# Altium PCB Pcb.PcbDoc
Units mm, origin at the board's own origin, x right, y up, seen from the top; angles counter-clockwise.
Board outline 71.32 x 98.44 mm, 2 copper layers (Top Layer, Bottom Layer); 88 components, 52 nets, 334 pads, 52 vias.
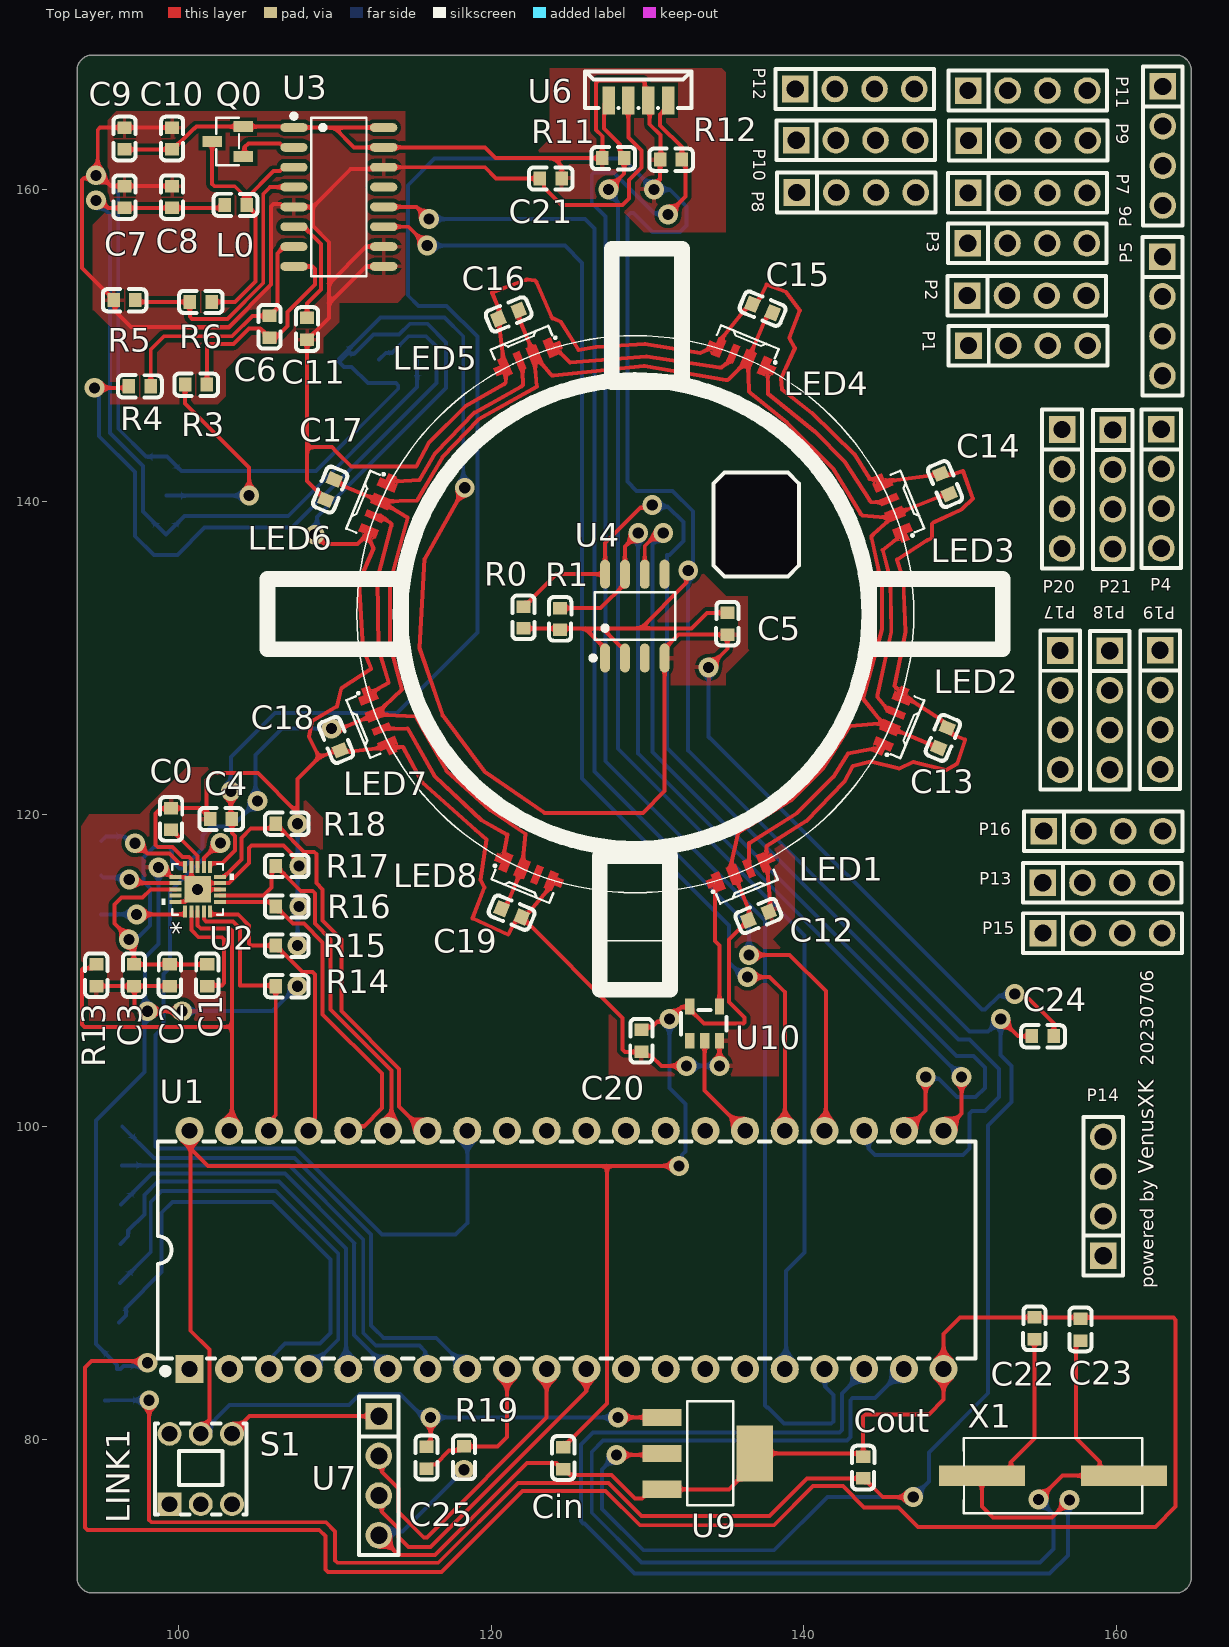
[diagram p0: Top Layer view]
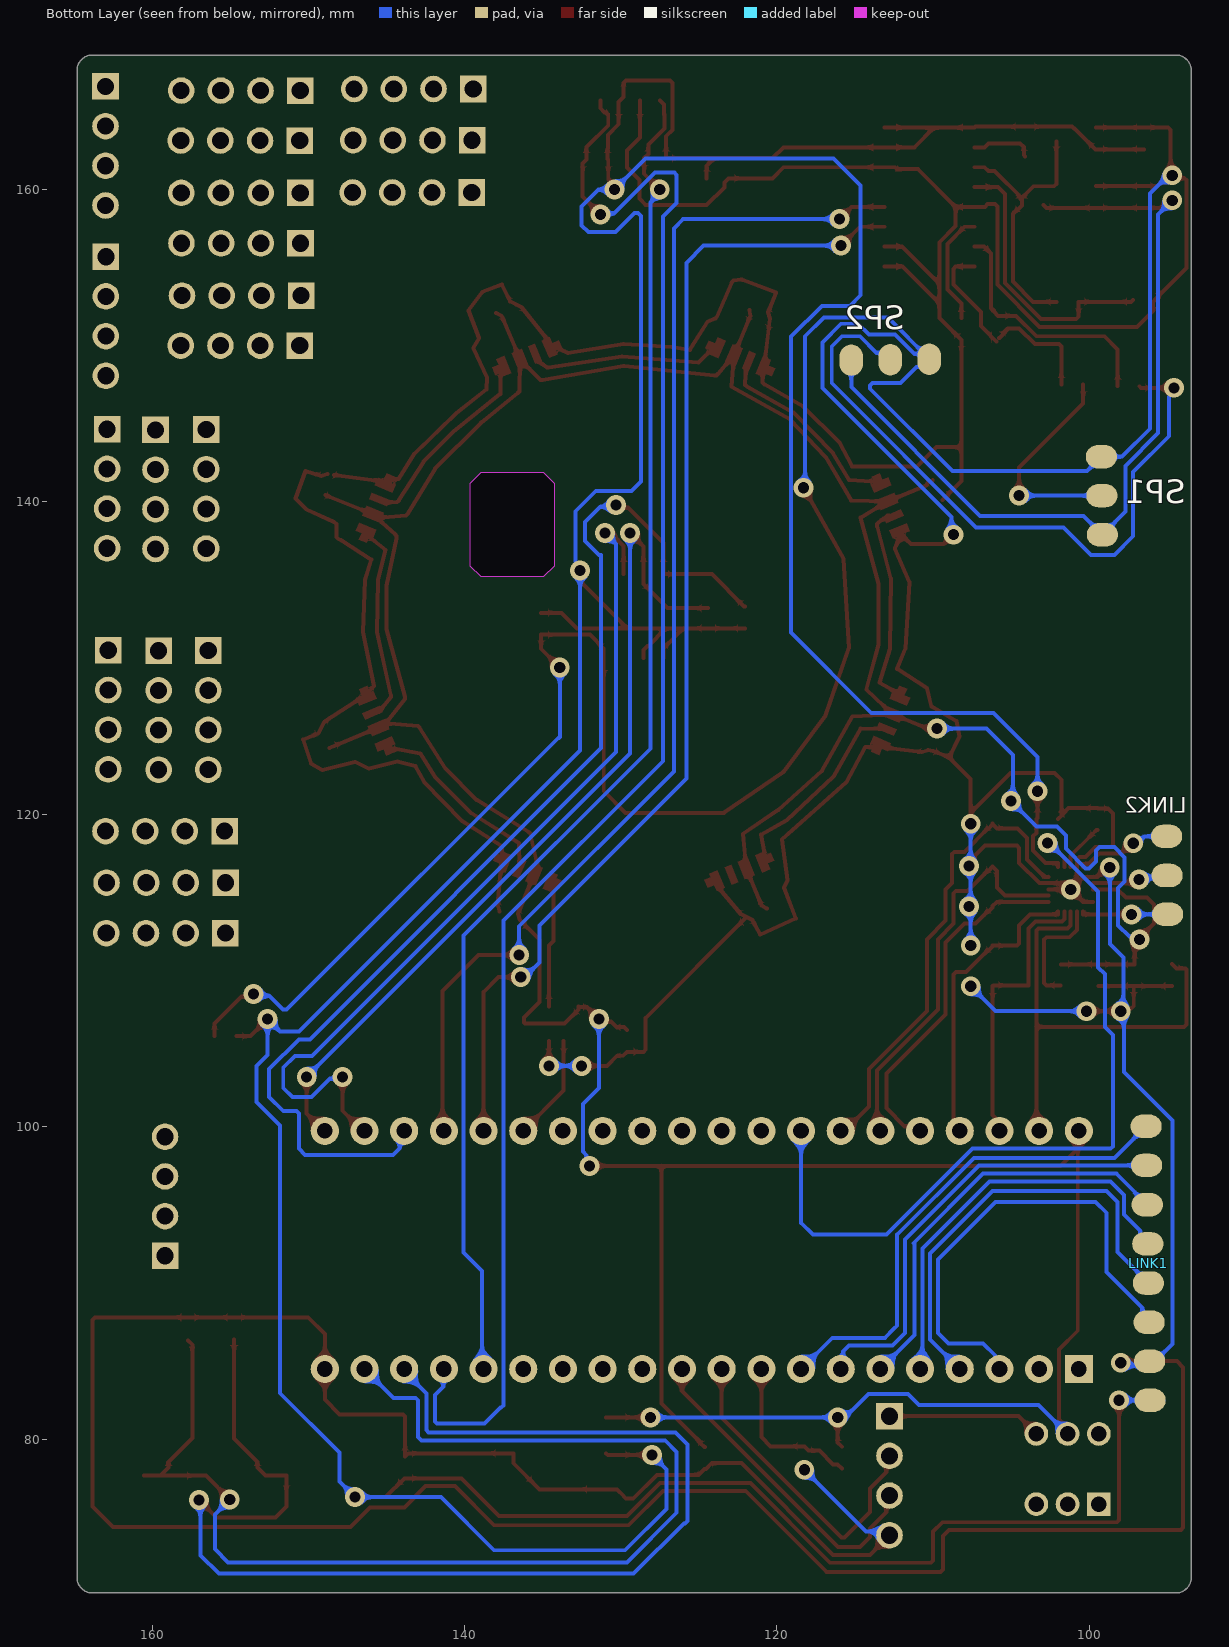
[diagram p1: Bottom Layer view, seen from below]

## Layer stack, top to bottom
Top Solder: solder mask 0.0102, Solder Resist, Dk 3.5
Top Layer: signal copper 0.0356
Dielectric 1: dielectric 0.32, FR-4, Dk 4.8
Bottom Layer: signal copper 0.0356
Bottom Solder: solder mask 0.0102, Solder Resist, Dk 3.5

## Board outline
93.48,71.165 93.48,167.6 cw(c94.48,167.6) 94.48,168.6 163.8,168.6 cw(c163.8,167.6) 164.8,167.6 164.8,71.165 cw(c163.8,71.165) 163.8,70.165 94.48,70.165 cw(c94.48,71.165)
cut-out: 134.225,135.925 134.225,141.175 134.925,141.875 138.975,141.875 139.675,141.175 139.675,135.925 138.975,135.225 134.925,135.225

## Design rules (kind name [scope] priority, off if disabled: settings)
Clearance [All] p1: gap=0.254 ignorepadtopadclearanceinfootprint=FALSE
PolygonConnect [All] p1: connectstyle=Relief reliefconductorwidth=0.254 reliefentries=4 polygonreliefangle="90 Angle" airgapwidth=0.254
RoutingVias [All] p1: holewidth=0.711 width=1.27 viastyle="Through Hole" minholewidth=0.711 minwidth=1.27 maxholewidth=0.711 maxwidth=1.27
SolderMaskExpansion [All] p1: expansion=0.102 istentingtop=FALSE
Width [All] p1: maxlimit=0.254 minlimit=0.15 preferedwidth=0.254
30 further rules are at their usual default settings.

## Components (designator, comment, footprint, x,y, rotation, side; value= is the part's Value field where it differs from the comment)
C0 "Capacitor 0.1 uF +/- 5% 16 V 0402" 0805贴片电容 99.5,119.7 r270 top value=100nF
C1 "Capacitor 0.1 uF +/- 5% 16 V 0402" 0805贴片电容 101.816,109.7 r270 top value=100nF
C2 "Capacitor 0.1 uF +/- 5% 16 V 0402" 0805贴片电容 99.416,109.7 r270 top value=100nF
C3 "Capacitor 0.1 uF +/- 5% 16 V 0402" 0805贴片电容 97.116,109.7 r270 top value=22uF
C4 "Capacitor 0.1 uF +/- 5% 16 V 0402" 0805贴片电容 102.7,119.7 r180 top value=100nF
C5 "Capacitor 0.1 uF +/- 5% 16 V 0402" 0805贴片电容 135.1,132.2 r270 top value=100nF
C6 "Capacitor 0.1 uF +/- 5% 16 V 0402" 0805贴片电容 105.8,151.2 r270 top value=100nF
C7 "Capacitor 0.1 uF +/- 5% 16 V 0402" 0805贴片电容 96.52,159.512 r90 top value=100nF
C8 "Capacitor 0.1 uF +/- 5% 16 V 0402" 0805贴片电容 99.568,159.512 r90 top value=10uF
C9 "Capacitor 0.1 uF +/- 5% 16 V 0402" 0805贴片电容 96.52,163.26 r90 top value=100nF
C10 "Capacitor 0.1 uF +/- 5% 16 V 0402" 0805贴片电容 99.568,163.26 r90 top value=10uF
C11 "Capacitor 0.1 uF +/- 5% 16 V 0402" 0805贴片电容 108.204,151.068 r90 top value=100nF
C12 "Capacitor 0.1 uF +/- 5% 16 V 0402" 0805贴片电容 137.1,113.5 r22.5 top value=100nF
C13 "Capacitor 0.1 uF +/- 5% 16 V 0402" 0805贴片电容 148.9,124.9 r67.5 top value=100nF
C14 "Capacitor 0.1 uF +/- 5% 16 V 0402" 0805贴片电容 149.032,141.147 r112.5 top value=100nF
C15 "Capacitor 0.1 uF +/- 5% 16 V 0402" 0805贴片电容 137.353,152.368 r157.5 top value=100nF
C16 "Capacitor 0.1 uF +/- 5% 16 V 0402" 0805贴片电容 121.1,152 r202.5 top value=100nF
C17 "Capacitor 0.1 uF +/- 5% 16 V 0402" 0805贴片电容 109.68,140.78 r247.5 top value=100nF
C18 "Capacitor 0.1 uF +/- 5% 16 V 0402" 0805贴片电容 110.068,124.753 r292.5 top value=100nF
C19 "Capacitor 0.1 uF +/- 5% 16 V 0402" 0805贴片电容 121.3,113.7 r337.5 top value=100nF
C20 "Capacitor 0.1 uF +/- 5% 16 V 0402" 0805贴片电容 129.6,105.5 r270 top value=100nF
C21 "Capacitor 0.1 uF +/- 5% 16 V 0402" 0805贴片电容 123.8,160.7 r180 top value=100nF
C22 "Capacitor 0.1 uF +/- 5% 16 V 0402" 0805贴片电容 154.75,87.1 r270 top value=20pF
C23 "Capacitor 0.1 uF +/- 5% 16 V 0402" 0805贴片电容 157.7,87.025 r270 top value=20pF
C24 "Capacitor 0.1 uF +/- 5% 16 V 0402" 0805贴片电容 155.3,105.8 r180 top value=10uF
C25 "Capacitor 0.1 uF +/- 5% 16 V 0402" 0805贴片电容 115.85,78.825 r270 top value=10uF
Cin "Capacitor 0.1 uF +/- 5% 16 V 0402" 0805贴片电容 124.6,78.8 r270 top value=4.7uF
Cout "Capacitor 0.1 uF +/- 5% 16 V 0402" 0805贴片电容 143.8,78.2 r90 top value=4.7uF
L0 "LQM2HPN1R0MJ0L" 0805贴片电容 103.632,159.004 r0 top value=3.3µH
LED1 "SK6812SIDE-A" FZ-SK6812SIDE-A 135.965,116.311 r22.5 top
LED2 "SK6812SIDE-A" FZ-SK6812SIDE-A 145.682,125.966 r67.5 top
LED3 "SK6812SIDE-A" FZ-SK6812SIDE-A 145.687,139.625 r112.5 top
LED4 "SK6812SIDE-A" FZ-SK6812SIDE-A 136.022,149.285 r157.5 top
LED5 "SK6812SIDE-A" FZ-SK6812SIDE-A 122.322,149.249 r202.5 top
LED6 "SK6812SIDE-A" FZ-SK6812SIDE-A 112.74,139.616 r247.5 top
LED7 "SK6812SIDE-A" FZ-SK6812SIDE-A 112.748,125.982 r292.5 top
LED8 "SK6812SIDE-A" FZ-SK6812SIDE-A 122.379,116.346 r337.5 top
LINK1 "LINK" LINK 96.119,82.5 r90 top
LINK2 "LINK2" LINK2 95.063,118.591 r270 top
P1 "4P" 2.54管脚 154.35,150 r0 top
P2 "4P" 2.54管脚 154.27,153.2 r0 top
P3 "4P" 2.54管脚 154.305,156.55 r0 top
P4 "4P" 2.54管脚 162.875,140.84 r270 top
P5 "4P" 2.54管脚 162.95,151.88 r270 top
P6 "4P" 2.54管脚 162.975,162.78 r270 top
P7 "4P" 2.54管脚 154.32,159.775 r0 top
P8 "4P" 2.54管脚 143.35,159.8 r0 top
P9 "4P" 2.54管脚 154.355,163.125 r0 top
P10 "4P" 2.54管脚 143.32,163.15 r0 top
P11 "4P" 2.54管脚 154.325,166.325 r0 top
P12 "4P" 2.54管脚 143.255,166.425 r0 top
P13 "4P" 2.54管脚 159.1,115.625 r0 top
P14 "4P" 2.54管脚 159.165,95.555 r90 top
P15 "4P" 2.54管脚 159.115,112.4 r0 top
P16 "4P" 2.54管脚 159.165,118.925 r0 top
P17 "4P" 2.54管脚 156.4,126.675 r270 top
P18 "4P" 2.54管脚 159.575,126.665 r270 top
P19 "4P" 2.54管脚 162.8,126.69 r270 top
P20 "4P" 2.54管脚 156.525,140.82 r270 top
P21 "4P" 2.54管脚 159.775,140.795 r270 top
Q0 "MMBT4403" FZ-MMBT4403 103.124,163.068 r0 top
R0 "4D7KR2F" 0805贴片电容 122.053,132.6 r270 top value=2.2k
R1 "4D7KR2F" 0805贴片电容 124.4,132.5 r270 top value=2.2k
R3 "4D7KR2F" 0805贴片电容 101.1,147.5 r180 top value=100
R4 "4D7KR2F" 0805贴片电容 97.5,147.4 r180 top value=100
R5 "4D7KR2F" 0805贴片电容 96.52,152.908 r180 top value=8.2k
R6 "4D7KR2F" 0805贴片电容 101.4,152.8 r180 top value=10k
R11 "4D7KR2F" 0805贴片电容 127.8,162 r180 top value=2.2k
R12 "4D7KR2F" 0805贴片电容 131.5,161.9 r180 top value=2.2k
R13 "4D7KR2F" 0805贴片电容 94.716,109.709 r90 top value=10K
R14 "4D7KR2F" 0805贴片电容 106.9,109 r180 top value=10K
R15 "4D7KR2F" 0805贴片电容 106.9,111.6 r180 top value=10K
R16 "4D7KR2F" 0805贴片电容 106.9,114.1 r180 top value=10K (schematic designator 16)
R17 "4D7KR2F" 0805贴片电容 106.9,116.7 r180 top value=10K
R18 "4D7KR2F" 0805贴片电容 106.9,119.4 r180 top value=10K
R19 "4D7KR2F" 0805贴片电容 118.25,78.85 r90 top value=10k
S1 "5.8^2-Switch" FZ-Switch 101.4,78.1 r180 top
SP1 "StrainPiece1" LINK2 99.169,137.9 r90 top
SP2 "StrainPiece2" LINK2 115.245,149.066 r180 top
U1 "STC89C51-PDIP-40" 封装.STC89C51-PDIP-40 124.81,92.12 r0 top
U2 "TMC6300-3" 封装.TMC6300 101.2,115.2 r90 top
U3 "HX711" 封装.HX711 110.236,159.512 r270 top
U4 "MT6701" 封装.MT6701 129.182,132.687 r0 top
U6 "VEML7700" 封装.VEML7700 129.405,165.7 r0 top
U7 "USB" 2.54管脚 112.8,77.67 r270 top
U9 "AP2114HA-3.3" 封装.AP2114HA-3.3TRG1 133.9,79.1 r180 top
U10 "SN74LV1T34DBV" 封装.SN74LV1T34DBVR 133.65,106.6 r270 top
X1 "9C12000002" HC-49S_L11.4-W4.8 155.947,77.675 r180 top value=-

## Footprints (in the part's own frame and the unit in brackets; to place one, negate y for a bottom-side part, rotate by r counter-clockwise, add the part's x,y. Pads: shape width x height; smd on the part's side, far side on the other; paste and mask are expansions set on the pad)
2.54管脚 [mm]
  rect 1.7x1.7 hole 1.1: 1(-3.81,0)
  round 1.7 hole 1.1: 2(-1.27,0) 3(1.27,0) 4(3.81,0)
  silkscreen extent -5.08,-1.27 5.08,1.27
0805贴片电容 [mm]
  rect 0.8x0.9 smd: 1(-0.7,0) 2(0.7,0)
  silkscreen extent -1.41,-0.71 1.39,0.72
FZ-MMBT4403 [mm]
  rect 1.25x0.7 smd: 1(1,0.95) 2(1,-0.95) 3(-1,0)
  silkscreen extent -0.73,-1.53 0.73,1.53
FZ-SK6812SIDE-A [mil]
  round 1 smd: 1(-70.87,-0.49) 2(-17.72,0.49) 3(22.64,0.49) 4(70.86,0.49)
  Top Layer region: -31.5,24.12 -31.5,-23.13 -3.94,-23.13 -3.94,24.12 -31.5,24.12
  Top Layer region: -51.18,23.13 -51.18,-24.11 -72.84,-24.11 -72.84,-8.36 -90.55,-8.36 -90.55,13.29 -72.84,13.29 -72.84,23.13 -51.18,23.13
  Top Layer region: 13.78,-23.13 31.49,-23.13 31.49,24.11 13.78,24.11 13.78,-23.13
  Top Layer region: 51.18,24.11 51.18,-23.13 72.83,-23.13 72.83,-7.38 90.55,-7.38 90.55,14.27 72.83,14.27 72.83,24.11 51.18,24.11
  silkscreen extent -87,-54 79,-16
FZ-Switch [mil]
  rect 60x60 hole 39.37: 1(78.74,88.59)
  round 60 hole 39.37: 2(0,88.59) 3(-78.74,88.59) 4(-78.74,-88.59) 5(0,-88.59) 6(78.74,-88.59)
  silkscreen extent -115,-115 115,115
HC-49S_L11.4-W4.8 [mm]
  rect 5.5x1.3 smd: 1(-4.553,0) 2(4.553,0)
  silkscreen extent -5.71,-2.41 5.72,2.41
LINK [mm]
  oval 1.5x2 smd far side: 1(0,0) 2(2.5,-0.031) 3(4.991,-0.063) 4(7.501,-0.104) 5(10.008,-0.145) 6(12.516,-0.182) 7(15.034,-0.228) 8(17.531,-0.256)
LINK2 [mm]
  oval 1.5x2 smd far side: 1(0,0) 2(2.5,-0.031) 3(4.991,-0.063)
封装.AP2114HA-3.3TRG1 [mm]
  rect 2.5x1.1 smd: 1(2.97,-2.3) 2(2.97,0) 3(2.97,2.3)
  rect 2.34x3.6 smd: 4(-2.97,0)
  silkscreen extent -1.57,-3.33 1.37,3.33
封装.HX711 [mm]
  oval 0.56x1.745 smd: 1(-4.445,-2.872) 2(-3.175,-2.872) 3(-1.905,-2.872) 4(-0.635,-2.872) 5(0.635,-2.872) 6(1.905,-2.872) 7(3.175,-2.872) 8(4.445,-2.872) 9(4.445,2.872) 10(3.175,2.872) 11(1.905,2.872) 12(0.635,2.872) 13(-0.635,2.872) 14(-1.905,2.872) 15(-3.175,2.872) 16(-4.445,2.872)
  silkscreen extent -5.33,-3.02 5.08,1.77
封装.MT6701 [mm]
  oval 0.63x1.865 smd: 1(-1.905,-2.682) 2(-0.635,-2.682) 3(0.635,-2.682) 4(1.905,-2.682) 5(1.905,2.683) 6(0.635,2.683) 7(-0.635,2.683) 8(-1.905,2.683)
  silkscreen extent -2.82,-2.83 2.58,1.52
封装.SN74LV1T34DBVR [mm]
  rect 1x0.6 smd paste+0 mask+0.05: 1(1.1,-0.95) 2(1.1,0) 3(1.1,0.95) 4(-1.1,0.95) 5(-1.1,-0.95)
  silkscreen extent -0.89,-1.52 0.7,1.4
封装.STC89C51-PDIP-40 [mm]
  rect 1.8x1.8 hole 1: 1(-24.13,-7.62)
  round 1.8 hole 1: 2(-21.59,-7.62) 3(-19.05,-7.62) 4(-16.51,-7.62) 5(-13.97,-7.62) 6(-11.43,-7.62) 7(-8.89,-7.62) 8(-6.35,-7.62) 9(-3.81,-7.62) 10(-1.27,-7.62) 11(1.27,-7.62) 12(3.81,-7.62) 13(6.35,-7.62) 14(8.89,-7.62) 15(11.43,-7.62) 16(13.97,-7.62) 17(16.51,-7.62) 18(19.05,-7.62) 19(21.59,-7.62) 20(24.13,-7.62) 21(24.13,7.62) 22(21.59,7.62) 23(19.05,7.62) 24(16.51,7.62) 25(13.97,7.62) 26(11.43,7.62) 27(8.89,7.62) 28(6.35,7.62) 29(3.81,7.62) 30(1.27,7.62) 31(-1.27,7.62) 32(-3.81,7.62) 33(-6.35,7.62) 34(-8.89,7.62) 35(-11.43,7.62) 36(-13.97,7.62) 37(-16.51,7.62) 38(-19.05,7.62) 39(-21.59,7.62) 40(-24.13,7.62)
  silkscreen extent -26.16,-7.95 26.16,6.93
封装.TMC6300 [mil]
  rect 30x10 smd paste+0 mask+0: 1(-56,31.5) 2(-56,15.75) 3(-56,0) 4(-56,-15.75) 5(-56,-31.5) 11(56,-31.5) 12(56,-15.75) 13(56,0) 14(56,15.75) 15(56,31.5)
  rect 10x30 smd paste+0 mask+0: 6(-31.5,-56) 7(-15.75,-56) 8(0,-56) 9(15.75,-56) 10(31.5,-56) 16(31.5,56) 17(15.75,56) 18(0,56) 19(-15.75,56) 20(-31.5,56)
  rect 67x67 smd paste+0 mask+0: 21(0,0)
  silkscreen extent -64,-91 64,91
封装.VEML7700 [mm]
  rect 0.8x1.8 smd paste+0 mask+0.05: 1(1.905,0) 2(0.635,0) 3(-0.635,0) 4(-1.905,0)
  silkscreen extent -3.4,-0.5 3.4,1.85

## Part data
C0 C1 C2 C3 C4 C5 C6 C7 C8 C9 C10 C11 C12 C13 C14 C15 C16 C17 C18 C19 C20 C21 C22 C23 C24 C25 Cin Cout: library part CAP-NP-2, "Chip Capacitor, 0.1 uF, +/- 5%, 16 V, 0402 (1005 Metric)", Capacitor Type=Ceramic, Case/Package=0402, Max Operating Temperature=125°C, Min Operating Temperature=-55°C, Tolerance=5%, Voltage Rating=16V, Mounting Technology=SM, Pins=2, RoHS Compliant=True
L0: library part CMP-006-00008-6, "Chip Inductor, 1 uH, +/- 20%, 1 MHz, -55 to 125 degC, 1008 (2520 Metric), RoHS, Tape and Reel", Case/Package=1008, Current Rating=1.5A, Manufacturer=Murata, Max Operating Temperature=85°C, Min Operating Temperature=-40°C, Package Description="2-Pin Surface Mount Device, Body 2.5 x 2 mm", Package Quantity=3000, Resistance=0.09Ohm, Self Resonant Frequency=70MHz, Tolerance=20%, Core Material=Ferrite, Datasheet URL=http://psearch.en.murata.com/inductor/product/LQM2HPN1R0MJ0%23.pdf, Datasheet Version=Aug-16, Mounting Technology=SM, Package Reference=1008, Packaging=TapeandReel, RoHS Compliant=True, Shielding=Shielded
LED1 LED2 LED3 LED4 LED5 LED6 LED7 LED8: library part CMP-007-000137-1, Design Item ID=SK6812SIDE-A, Source=IC.SchLib
LINK1: library part CMP-014-000001-1, Design Item ID=LINK, Source=Board.SchLib
LINK2: library part CMP-014-000018-1, Design Item ID=LINK2, Source=Board.SchLib
P1 P2 P3 P4 P5 P6 P7 P8 P9 P10 P11 P12 P13 P14 P15 P16 P17 P18 P19 P20 P21: library part CMP-014-000031-1, Design Item ID=4P, Source=Board.SchLib
Q0: library part CMP-013-00004-3, Case/Package=TO-92-3, Manufacturer=Unisonic, Package Description="3-Pin Through Hole Device, Dia 4.58 mm, Pitch 1.27 mm", Datasheet URL=http://media.nkcelectronics.com/datasheet/s8550.pdf, Datasheet Version="Rev. E, 06/2014", Mounting Technology=TH, Package Reference=TO-92-3, RoHS Compliant=Unknown
R0 R1 R3 R4 R5 R6 R12 R13 R14 R15 R16 R17 R18 R19: library part CMP-009-00105-2, "4K7 0.063W 1% 0402 (1005 Metric)  SMD", Case/Package=0402, Power=63mW, Tolerance=1%, Mounting Technology=SMT, Pins=2
R11: library part CMP-009-00105-2, Case/Package=0402, Power=63mW, Tolerance=1%, Mounting Technology=SMT, Pins=2
S1: library part CMP-011-00013-1, Design Item ID=5.8^2-Switch, Designer=U?, Device="5.8 ZSPT", Source=IC.SchLib, Symbol="5.8 ZSPT"
SP1: library part CMP-014-000027-1, Design Item ID=StrainPiece1, Source=Board.SchLib
SP2: library part CMP-014-000028-1, Design Item ID=StrainPiece2, Source=Board.SchLib
U1: library part CMP-007-000098-1, "主控MCU", Design Item ID=STC89C51-PDIP-40, Source=IC.SchLib
U2: library part CMP-007-000236-1, Design Item ID=TMC6300-3, Source=IC.SchLib
U3: library part CMP-007-000093-1, "压力模数转换器", Design Item ID=HX711, Source=IC.SchLib
U4: library part CMP-007-000116-1, "霍尔传感器", Design Item ID=MT6701, Source=IC.SchLib
U6: library part CMP-007-000095-1, "感光想读传感器", Design Item ID=VEML7700, Source=IC.SchLib
U7: library part CMP-007-000053-1, Design Item ID=USB, Source=IC.SchLib
U9: library part CMP-007-000082-1, "电压控制器", Design Item ID=AP2114HA-3.3, Source=IC.SchLib
U10: library part CMP-007-000097-1, "电流放大器", Design Item ID=SN74LV1T34DBV, Source=IC.SchLib
X1: library part CMP-007-000156-1, JLCPCB Part Class="Extended Part", LCSC Part Name="SMD HC-49S 12M 49SMD 20pF 20ppm 30R 0~70℃", Load Capacitance=-, Manufacturer=TXC(晶技), Add into BOM=yes, Convert to PCB=yes, Crystal Type=-, Datasheet=https://atta.szlcsc.com/upload/public/pdf/source/20161217/1481939208787.pdf, Design Item ID=9C12000002, Device=9C12000002, Manufacturer Part=9C12000002, Operating Temperature=-, Source=IC.SchLib, Supplier Footprint=HC-49S-SMD, Supplier Part=C90939, Symbol=9C1202LCSC-DDK2S

## Via types
v1: diameter 1.27, hole 0.711, Top Layer to Bottom Layer, 52 vias

## Nets (pads, with @x,y where several pads share a name; then routed paths per layer and width w, separated by ;. In a path a pad name is that pad's centre, name@x,y a point inside that pad or via, vN(x,y) a via of type N, cw(c..) or ccw(c..) an arc to the next point about the centre after c; other vN are vias at no path point)
+3.3V: C4.1 C5.1 C9.1 C10.1 C21.1 C24.2 Cout.1 LINK1.1 Q0.1 R0.2 R1.2 R11.2 R12.2 U2.11 U3.1 U3.15 U3.16 U4.1 U4.2 U6.2 U9.2 | length 356.7
  Top Layer w0.254: C9.1 C10.1 99.618,162.56 100.958,163.9 101,163.9 101.118,164.018 Q0.1 106.494,164.018 106.496,164.016 107.305,164.016 U3.1 109.943,163.957 ; v1(98.1,82.5) 98.1,74.842 98.249,74.693 109.407,74.693 110,74.1 110,72.249 110.149,72.1 116.6,72.1 121.7,77.2 127.5,77.2 129.6,75.1 137.8,75.1 140.2,77.5 Cout.1 143.85,77.5 145.05,76.3 v1(147,76.3) ; U2.11 102,116.876 102.803,116.876 103.6,117.674 103.6,118.6 103.4,118.8 C4.1 103.325,119.775 v1(103.325,121.475) ; U3.16 109.943,163.957 ; R0.2 125.999,131.9 ; C21.1 124.5,161.5 124,162 ; U4.1 127.277,130.622 125.999,131.9 ; v1(128,79) 130.83,79 U9.2 ; U4.2 128.547,130.521 128.281,130.786 128.234,130.786 127.121,131.9 ; v1(130.4,160) 130.4,160.275 130.8,160.675 R12.2 130.848,161.948 130.848,162.582 130.82,162.61 130.82,163.48 130.132,164.168 130.132,165.608 U6.2 129.82,165.92 129.82,166.811 129.672,166.96 126.849,166.96 126.7,166.811 126.7,163.8 127.1,163.4 R11.2 124,162 ; v1(132.6,135.6) 132.472,135.472 132.472,134.8 129.572,131.9 ; C5.1 133.8,132.9 132.8,131.9 129.572,131.9 ; v1(152.6,106.9) 153.7,105.8 C24.2 ; 109.943,163.957 111.213,162.687 U3.15 119.587,162.687 120.274,162 124,162 ; 125.999,131.9 127.121,131.9 ; 127.121,131.9 129.572,131.9
  Bottom Layer w0.254: LINK1.1@95.269,82.484 95.519,82.484 95.534,82.5 v1(98.1,82.5) ; v1(103.325,121.475) 103.325,123.675 106.15,126.5 113.965,126.5 119.1,131.635 119.1,150.583 117.133,152.55 115.325,152.55 114.65,153.225 114.65,160.25 116.375,161.975 128.425,161.975 v1(130.4,160) 130.416,159.984 131.416,159.984 132.5,158.9 132.5,157.7 132.075,157.275 130.325,157.275 129.105,158.495 128.895,158.495 128.7,158.3 128.7,141.3 129.3,140.7 131.6,140.7 132.9,139.4 132.9,136.175 132.6,135.875 v1(132.6,135.6) 132.6,124.1 150.6,106.1 151.8,106.1 v1(152.6,106.9) 152.6,104.6 153.3,103.9 153.3,101.6 151.8,100.1 151.8,82.95 148,79.15 148,77.3 v1(147,76.3) 141.5,76.3 138.1,72.9 129.725,72.9 127.075,75.55 127.075,78.075 v1(128,79)
+5V: C1.1 C2.1 C3.1 C12.1 C13.1 C14.1 C15.1 C16.1 C17.1 C18.1 C19.1 C20.1 C25.1 Cin.1 LED1.2 LED2.2 LED3.2 LED4.2 LED5.2 LED6.2 LED7.2 LED8.2 S1.5 U1.40 U2.18 U9.1 U10.5 | length 300.7
  Top Layer w0.254: U2.18 98.2,115.2 97.675,114.675 96.325,114.675 95.875,114.225 95.875,113.024 96.808,112.091 v1(96.808,111.992) 97.116,111.684 C3.1 C2.1 C1.1 ; U1.40 U1.40@100.732,99.688 ; U1.40@100.75,99.67 100.75,86.95 101.95,85.75 101.95,81.244 101.4,80.694 S1.5 ; 100.776,98.582 101.858,97.5 127.4,97.5 ; C18.1 110.152,125.393 LED7.2 ; C17.1@110.03,141.374 C17.1@110.03,141.386 ; C17.1@110.228,141.328 110.462,141.047 LED6.2 ; C25.1 116.114,79.789 v1(116.114,81.4) ; C16.1 121.71,151.903 LED5.2 ; Cin.1 124.65,79.5 124.923,79.773 124.923,79.823 127.4,82.3 127.4,97.5 ; v1(128.1,81.4) U9.1 ; C20.1 129.782,106.382 130.282,106.382 130.636,106.736 131.236,106.736 v1(131.4,106.9) 132.168,107.668 132.667,107.668 U10.5 132.7,107.5 133.6,106.6 136.13,106.6 136.2,106.67 136.2,107 135.2,108 135.2,111.979 C12.1 136.582,113.635 LED1.2 135.308,116.523 135.308,116.625 135.79,118.781 135.842,118.833 135.863,118.854 135.889,118.87 139.221,120.921 141.215,122.924 142.879,125.544 142.894,125.568 142.979,125.653 145.153,125.844 LED2.2 ; v1(132,97.5) 127.4,97.5 ; C15.1 137.624,151.906 LED4.2 ; 144.412,137.893 144.338,137.819 144.338,137.714 144.338,137.687 144.343,137.661 144.994,134.626 145,131.835 143.81,127.535 143.8,127.501 143.8,127.378 145.036,125.834 145.179,125.655 145.252,125.582 LED2.2 ; 144.412,137.894 144.416,137.897 145.564,138.946 LED3.2 C14.1@148.897,140.429 ; 145.553,138.959 143.741,139.124 143.676,139.189 143.655,139.21 143.639,139.236 141.878,142.122 138.938,145.059 138.929,145.068 136.581,146.97 136.571,146.979 136.562,146.988 136.49,147.06 LED4.2 ; C13.1 148.335,124.38 LED2.2 ; LED7.2 115.173,126.27 117.132,122.771 119.914,120.291 122.184,118.741 LED8.2 C19.1@120.993,114.177 ; LED7.2 114.283,127.99 113.509,130.868 113.5,134.766 114.644,138.994 LED6.2 ; LED6.2 115.253,140.096 116.885,142.874 119.174,145.272 122.906,147.378 LED5.2 ; C19.1@120.993,114.177 C19.1 C19.1@120.993,114.177 ; LED5.2 123.782,148.191 123.788,148.183 123.795,148.176 123.87,148.102 123.975,148.102 123.988,148.102 129.778,148.698 129.813,148.698 135.001,147.792 135.023,147.792 135.128,147.792 135.203,147.867 LED4.2
  Bottom Layer w0.254: v1(96.808,111.992) 97.003,112.186 97.451,112.186 98.165,112.9 98.165,115.282 97.75,115.697 97.75,117.252 98.398,117.9 99.357,117.9 99.574,117.682 99.574,116.995 100.03,116.54 100.24,116.54 101.5,117.8 101.5,118.651 102.066,119.217 103.392,119.217 v1(105.025,120.85) 104.9,120.975 104.9,123.8 106.592,125.492 v1(109.762,125.492) ; S1.5 103.25,82.2 110.9,82.2 111.6,82.9 114.151,82.9 115.651,81.4 v1(116.114,81.4) v1(128.1,81.4) ; v1(131.4,106.9) 131.4,102.5 132.425,101.475 132.425,98.425 132.214,98.214 132.214,98.177 132.194,98.157 132.194,97.694 v1(132,97.5)
LCD_BACKLIGHT: LINK1.6 U1.6 | length 26.6
  Bottom Layer w0.254: LINK1.6 98.285,97 106.8,97 111.25,92.55 111.2,92.5 111.2,86.68 U1.6
LCD_CMD: LINK1.8 U1.8 | length 31.9
  Bottom Layer w0.254: LINK1.8 98.406,98 107.4,98 112.303,93.097 112.303,87.297 112.5,87.1 113.1,86.5 116.46,86.5 U1.8
LCD_CS: LINK1.7 U1.7 | length 29.1
  Bottom Layer w0.254: LINK1.7 107.066,97.534 111.8,92.8 111.8,86.8 112.6,86 115.4,86 115.768,85.632 115.768,84.652 U1.7
LCD_DATA: LINK1.5 U1.5 | length 26.6
  Bottom Layer w0.254: LINK1.5 96.753,92.997 96.753,93.353 97.8,94.4 97.8,95.649 98.648,96.497 106.403,96.497 110.7,92.2 110.7,84.64 U1.5
LCD_RST: LINK1.3 U1.3 | length 30.7
  Bottom Layer w0.254: LINK1.3 96.607,87.916 96.607,88.407 98.9,90.7 98.9,94.5 99.6,95.2 106,95.2 109.7,91.5 109.7,86.8 109.025,86.125 106.8,86.125 106.056,85.381 106.056,84.796 U1.3
LCD_SCK: LINK1.4 U1.4 | length 28.1
  Bottom Layer w0.254: LINK1.4@96.227,90.004 98.2,91.977 98.2,95.2 98.9,95.9 106.2,95.9 110.2,91.9 110.2,86.4 U1.4
LED_DATA_3V3: U1.26 U10.2 | length 6.8
  Top Layer w0.254: U10.2 133.65,102.33 U1.26
LED_DATA_5V: LED1.1 U10.4 | length 8
  Top Layer w0.254: LED1.1 134.307,111.902 134.6,111.609 U10.4
MAG_CLK: R1.1 U1.21 U4.7 | length 55.7
  Top Layer w0.254: R1.1 126.994,133.2 128.547,134.752 U4.7 128.547,137.147 v1(129.4,138) ; U1.21@149.03,99.72 149.03,99.78 150.1,100.85 v1(150.1,103.2)
  Bottom Layer w0.254: v1(129.4,138) 129.4,123.9 v1(150.1,103.2)
MAG_CSN: U1.22 U4.6 | length 57.2
  Top Layer w0.254: U4.6 129.817,137.183 130.439,137.806 130.806,137.806 v1(131,138) ; U1.22@146.49,99.72 147.8,101.03 v1(147.8,103.2)
  Bottom Layer w0.254: v1(131,138) 130.3,137.3 130.3,124 149.759,104.541 150.859,104.541 151.6,103.8 151.6,102.5 151,101.9 149.8,101.9 148.614,103.086 147.914,103.086 v1(147.8,103.2)
MAG_DO: R0.1 U1.23 U4.8 | length 73.7
  Top Layer w0.254: R0.1 122.103,133.3 124.173,135.37 U4.8 127.277,137.377 129.536,139.636 130.136,139.636 v1(130.3,139.8)
  Bottom Layer w0.254: v1(130.3,139.8) 130.416,139.684 131.316,139.684 132.3,138.7 132.3,137.5 131.4,136.6 131.249,136.6 131.249,124.251 149.9,105.6 150.6,105.6 152.5,103.7 152.5,101.9 151.6,101 150.749,101 150.6,100.851 150.6,98.6 150.2,98.2 144.568,98.2 144.151,98.617 144.151,99.519 U1.23@143.95,99.72
NetC0_2: C0.2 U2.13 | length 3.1
  Top Layer w0.254: C0.2 99.55,119 99.823,118.727 101.2,117.35 U2.13
NetC1_2: C1.2 U2.2 | length 7.4
  Top Layer w0.254: U2.2 100.8,112.6 101.265,112.135 102.751,112.135 102.9,111.986 102.9,109.201 102.751,109.052 C1.2@101.868,109.052
NetC6_1: C6.1 R4.1 U3.7 | length 16.3
  Top Layer w0.254: R4.1 98.2,149.751 99.049,150.6 103.4,150.6 104.7,151.9 C6.1 105.85,151.9 106.123,152.173 106.123,152.223 106.3,152.4 106.3,155.9 106.737,156.337 U3.7
NetC6_2: C6.2 R3.1 U3.8 | length 14.4
  Top Layer w0.254: R3.1 101.8,149.951 101.949,150.1 103.5,150.1 104.5,151.1 105.2,151.1 105.477,150.823 105.477,150.773 105.75,150.5 C6.2 ; C6.2@105.951,150.249 106.948,151.245 106.948,152.148 108.712,153.912 108.712,154.918 108.563,155.067 U3.8
NetC11_2: C11.2 U3.6 | length 7.3
  Top Layer w0.254: U3.6 107.993,157.607 109.1,156.5 109.1,153.604 108.204,152.708 C11.2
NetC22_2: C22.2 U1.18 X1.2 | length 82.4
  Top Layer w0.254: C22.2 154.75,80.052 153.255,78.557 153.255,78.198 152.732,77.675 X1.2 151.394,75.706 152.1,75 155.875,75 v1(157,76.125)
  Bottom Layer w0.254: U1.18 143.86,84.355 142.44,82.935 142.44,80.599 142.291,80.45 126.5,80.45 125.725,79.675 125.725,74.774 125.874,74.625 125.95,74.625 129.175,71.4 155.725,71.4 156.9,72.575 156.9,76.025 v1(157,76.125)
NetC23_2: C23.2 U1.19 X1.1 | length 78.3
  Top Layer w0.254: v1(155.025,76.15) 156.55,77.675 X1.1@159.828,77.675 ; C23.2 157.688,86.325 157.415,86.052 157.415,80.088 158.945,78.557 158.945,78.198 159.468,77.675 X1.1@159.828,77.675 ; X1.1 160.057,77.675 X1.1@159.828,77.675
  Bottom Layer w0.254: U1.19 144.55,82.65 143.124,82.65 142.975,82.501 142.975,80.15 142.75,79.925 127.15,79.925 126.425,79.2 126.425,75.3 129.6,72.125 155.125,72.125 155.975,72.975 155.975,75.2 v1(155.025,76.15)
NetC25_2: C25.2 R19.2 U1.9 | length 10.3
  Top Layer w0.254: C25.2 116.123,78.398 116.413,78.398 117.292,79.277 117.977,79.277 R19.2 120.403,79.55 121,80.147 U1.9
NetL0_2: L0.2 Q0.3 R6.1 U3.3 | length 18.1
  Top Layer w0.254: R6.1 103.6,152.8 104.9,154.1 104.9,158.436 104.655,158.681 104.605,158.681 L0.2@104.332,158.954 ; Q0.3 102.124,160.349 102.273,160.2 103.576,160.2 L0.2@104.408,159.368 ; L0.2 104.332,159.432 106.064,161.164 106.469,161.164 106.722,161.417 U3.3
NetLED1_3: LED1.3 LED2.1 | length 12.5
  Top Layer w0.254: LED1.3 136.499,118.155 139.576,120.085 141.879,122.379 142.837,123.9 LED2.1
NetLED2_3: LED2.3 LED3.1 | length 12.9
  Top Layer w0.254: LED2.3 145.482,126.548 145.409,126.621 144.714,127.496 144.714,127.584 144.714,127.612 144.72,127.638 145.594,131.671 145.546,135.029 145.048,136.919 LED3.1
NetLED3_3: LED3.3 LED4.1 | length 12.6
  Top Layer w0.254: LED4.1 137.701,146.918 140.71,144.49 142.615,142.577 144.206,140.093 144.221,140.07 144.311,139.98 145.138,139.952 145.243,139.952 LED3.3
NetLED4_3: LED4.3 LED5.1 | length 12.5
  Top Layer w0.254: LED5.1 125.027,148.91 129.928,149.296 134.607,148.611 134.625,148.609 134.724,148.609 135.345,149.041 135.418,149.113 LED4.3
NetLED5_3: LED5.3 LED6.1 | length 12.8
  Top Layer w0.254: LED6.1 115.388,141.409 115.404,141.436 116.42,143.121 118.933,145.718 121.903,147.374 121.934,147.391 121.959,147.416 122.033,147.491 122.033,147.603 121.961,148.862 121.887,148.936 LED5.3
NetLED6_3: LED6.3 LED7.1 | length 13.2
  Top Layer w0.254: LED7.1 113.431,128.426 112.771,130.596 112.717,135.094 113.586,138.42 113.594,138.451 113.594,138.589 113.507,138.676 112.917,139.12 112.815,139.12 LED6.3
NetLED7_3: LED7.3 LED8.1 | length 12.9
  Top Layer w0.254: LED7.3 114.641,125.496 116.381,122.434 119.377,119.622 121.021,118.7 LED8.1
NetQ0_2: Q0.2 U3.2 | length 4
  Top Layer w0.254: Q0.2 104.2,162.194 104.2,162.7 104.45,162.95 106.469,162.95 106.732,162.687 U3.2
NetR5_1: R5.1 R6.2 U3.4 | length 18
  Top Layer w0.254: R5.1 97.328,152.8 R6.2 100.7,151.849 100.849,151.7 103.1,151.7 105.4,154 105.4,159.7 105.847,160.147 U3.4
NetS1_4: S1.4 U7.1 | length 9.9
  Top Layer w0.254: S1.4 104.53,81.48 U7.1
SCL: R12.1 U1.17 U6.1 | length 107
  Top Layer w0.254: v1(131.3,158.4) 132.436,159.536 132.436,161.664 R12.1 132.2,162.7 130.8,164.1 130.8,164.778 130.949,164.927 131.037,164.927 131.31,165.2 U6.1 ; U1.17@141.4,84.072 U1.17@141.4,84.47
  Bottom Layer w0.254: v1(131.3,158.4) 131.244,158.456 130.433,158.456 127.813,161.075 126.574,161.075 126.425,160.926 126.425,159.14 127.3,158.265 127.3,123.4 137.5,113.2 137.5,82.174 137.649,82.025 137.7,82.025 138.725,81 141.751,81 141.9,81.149 141.9,82.825 141.357,83.368 141.357,84.463 U1.17
SDA: R11.1 U1.16 U6.4 | length 88
  Top Layer w0.254: v1(127.5,160) 128.5,161 R11.1 128.227,162.273 128.227,162.873 127.2,163.9 127.2,164.778 127.227,164.805 127.227,165.427 U6.4 ; U1.16@138.87,84.48 U1.16@138.876,84.474
  Bottom Layer w0.254: v1(127.5,160) 127.5,159.763 128.1,159.163 128.1,124.2 140.05,112.25 140.05,91.95 138.87,90.77 U1.16@138.87,84.48
STRAIN_DO: U1.24 U3.12 | length 79.5
  Top Layer w0.254: U3.12 115.223,158.877 v1(116,158.1) ; v1(136.5,111) 139.09,111 141.41,108.68 U1.24@141.41,99.72
  Bottom Layer w0.254: v1(116,158.1) 126,158.1 126.6,157.5 126.6,122.738 136.5,112.838 v1(136.5,111)
STRAIN_E+: C7.1 C8.1 L0.1 SP1.1 SP2.1 | length 53.6
  Top Layer w0.254: v1(94.7,159.3) 94.975,159.3 95.463,158.812 C7.1 C8.1 102.74,158.812 L0.1
  Bottom Layer w0.254: v1@94.7,159.2 v1(94.7,159.3) 95.6,158.4 95.6,144.4 97.7,142.3 97.7,139.369 SP1.1 100.369,139.1 107,139.1 115.245,147.345 SP2.1
STRAIN_E-: C0.1 C2.2 C3.2 C4.2 C5.2 C7.2 C8.2 C9.2 C10.2 C11.1 C12.2 C13.2 C14.2 C15.2 C16.2 C17.2 C18.2 C19.2 C20.2 C21.2 C22.1 C23.1 C24.1 Cin.2 Cout.2 LED1.4 LED2.4 LED3.4 LED4.4 LED5.4 LED6.4 LED7.4 LED8.4 LINK1.2 R5.2 R13.1 R14.1 R15.1 R16.1 R17.1 R18.1 R19.1 SP1.3 SP2.3 U1.20 U2.8 U2.9 U2.14 U2.16 U2.20 U2.21 U3.5 U3.9 U3.10 U3.14 U4.4 U6.3 U7.4 U9.3 U9.4 U10.3 | length 723.4
  Top Layer w0.254: R13.1 99.407,109.009 C2.2 ; C3.2@97.166,109 97.166,107.734 97.336,107.564 ; v1(98,84.9) 97.9,85 94.4,85 94,84.6 94,74.349 94.149,74.2 108.983,74.2 109.383,73.8 109.383,71.664 109.532,71.516 116.816,71.516 122,76.7 127.3,76.7 129.5,74.5 138.1,74.5 140.6,77 142.5,77 143.85,75.65 146.05,75.65 147.3,74.4 162.5,74.4 163.8,75.7 163.8,87.651 163.651,87.8 159.375,87.8 C22.1 150,87.8 148.94,86.74 U1.20 148.94,82.54 148,81.6 143.949,81.6 143.8,81.451 Cout.2 143.6,79.1 U9.4 136.87,78.47 135.2,76.8 U9.3 130.23,76.8 129.807,76.377 129.807,76.349 129.658,76.2 129.2,76.2 127.68,77.72 125.03,77.72 124.65,78.1 124.55,78.1 124.175,78.475 122.275,78.475 116.4,72.6 114.06,72.6 U7.4 ; v1(98,107.4) v1(100.2,107.4) ; v1(98.7,116.6) 98.924,116.6 99.524,116 U2.16 100.4,116 U2.21@100.8,115.6 ; C8.2 C7.2 95.649,160.212 94.961,160.9 v1(94.7,160.9) ; C10.2 C9.2 94.957,163.96 94.808,163.811 94.808,161.008 v1(94.7,160.9) ; U2.20 100.4,114.4 v1(101.2,115.2) ; C4.2@101.8,119.95 101.35,120.4 C0.1 99.469,120.369 98.818,120.369 98.5,120.051 98.5,118.049 98.649,117.9 99.6,117.9 100.243,117.257 100.651,117.257 100.8,117.109 U2.14 U2.21@100.8,115.6 ; C4.2 101.775,119.925 101.775,122.2 102.225,122.65 105.05,122.65 107.6,120.1 ; U2.8 v1(101.2,115.2) ; R14.1@107.36,109.24 v1(107.6,109) R14.1@107.4,108.8 ; v1(107.6,111.6) 107.6,111.65 R15.1@107.873,111.923 ; R17.1 107.354,116.946 107.354,117.335 106.689,118 104.649,118 104.5,117.851 104.5,116.9 103.2,115.6 101.6,115.6 v1(101.2,115.2) ; v1(107.6,119.4) 107.6,120.1 ; v1(108.7,137.9) 108.737,137.9 109.332,137.305 111.419,137.305 LED6.4 112.456,137.005 111.527,134.871 111.788,130.602 112.313,129.314 110.393,128.061 110.126,126.913 108.511,125.965 108.318,124.989 108.981,123.642 ; C17.2 108.204,141.341 108.204,143.5 ; U3.9 111.967,155.067 109.6,152.7 ; U3.10 111.987,156.337 109.6,153.95 ; v1(118.3,140.9) 115.729,136.352 115.403,130.65 116.887,126.338 119.575,122.734 123.4,120.1 129.7,120.1 131.087,121.487 U4.4 131.087,130.609 131.978,131.5 C5.2 135.1,130.6 v1(133.9,129.4) ; LED8.4 122.323,113.626 C19.2 ; U6.3 128.77,163.33 129.6,162.5 129.6,161.4 128.81,160.61 128.81,159.41 128.4,159 124.5,159 123.373,160.127 123.373,160.427 C21.2 120.3,160.7 119.583,161.417 U3.14 112.433,161.417 112.306,161.289 110.984,161.289 108.572,158.877 ; v1(132.5,103.9) 130.88,103.9 130.23,104.55 129.85,104.55 C20.2 128.549,104.8 128.4,104.949 128.4,106.979 C19.2 ; v1(134.6,103.9) U10.3 ; C12.2 137.875,114.171 LED1.4 137.603,117.95 140.174,119.584 142.576,122.075 143.141,123.094 144.292,123.386 146.102,122.925 147.013,123.359 149.086,122.829 149.812,123.249 150.326,124.781 149.365,125.179 C13.2 148.974,125.923 LED2.4 145.799,128.2 146.494,131.67 146.362,135.026 145.962,136.303 147.885,137.54 147.9,137.55 148.093,137.638 148.2,137.745 148.2,138.588 148.307,138.695 148.348,138.714 150.135,139.535 150.814,140.214 150.182,141.973 149.167,141.665 C14.2 ; C14.2@148.361,141.722 LED3.4 144.207,141.474 143.217,143.073 140.509,145.691 138.6,147.2 138.546,147.935 139.433,149.854 139.065,150.488 139.744,152.254 138.846,153.44 137.614,153.917 137.082,152.83 C15.2 136.331,152.442 LED4.4 133.37,149.531 129.828,150.096 126.711,149.901 125.579,149.727 124.445,151.529 123.97,151.73 123.925,151.75 123.856,151.819 122.9,154.023 122.881,154.067 122.785,154.163 122.311,154.225 122.248,154.225 122.205,154.208 120.046,153.393 120.569,152.13 C16.2 120.494,151.399 120.806,148.834 120.806,148.731 LED5.4 120.83,148.392 120.904,148.318 120.921,147.746 120.921,147.742 120.921,147.633 120.846,147.559 120.822,147.534 120.792,147.517 118.33,146.117 116.027,143.827 115.191,142.27 111.032,142.27 110.102,143.2 110.1,143.2 109.8,143.5 108.204,143.5 ; v1(153.5,108.5) 153.664,108.336 154.264,108.336 156,106.6 C24.1 ; v1(94.7,160.9) 94.506,160.706 93.906,160.706 93.8,160.6 93.8,154.978 95.82,152.958 R5.2 95.924,152.804 95.924,152.226 96.95,151.2 103.2,151.2 105.9,153.9 105.9,158.901 106.049,159.05 106.515,159.05 106.688,158.877 108.572,158.877 ; U2.21@100.8,115.6 v1(101.2,115.2) ; 107.6,120.1 107.6,122.262 108.981,123.642 ; 108.204,143.5 C11.1 109.6,151.764 109.6,152.7 ; 108.572,158.877 108.572,157.645 109.6,156.617 109.6,153.95 ; 108.981,123.642 110.003,124.066 C18.2 110.739,123.978 LED7.4 114.344,124.303 115.579,122.039 118.999,119.001 119.69,118.396 119.313,115.79 119.549,115.304 118.794,113.345 121.081,112.3 121.571,113.238 C19.2 ; 109.6,152.7 109.6,153.95
  Bottom Layer w0.254: v1(94.7,160.9) 94.961,160.9 96.12,159.741 96.12,144.68 97.909,142.891 SP1.3 100.16,141.963 108.762,141.963 114.041,147.241 114.041,147.451 113.892,147.6 112.1,147.6 111.06,148.64 110.56,148.64 SP2.3@110.254,148.946 ; v1@97.8,106.825 97.8,103.5 94.7,100.4 94.7,86.1 96.04,84.76 96.04,84.509 96.274,84.509 96.47,84.706 97.806,84.706 v1(98,84.9) ; v1(98,107.4) 97.832,107.568 97.832,110.832 98.7,111.7 v1(98.7,116.6) ; v1(100.2,107.4) 106,107.4 v1(107.6,109) ; v1(107.6,111.6) v1(107.6,119.4) ; v1(108.7,137.9) 108.843,138.043 108.843,139.043 117.1,147.3 117.1,150.2 115.9,151.4 114.8,151.4 114.1,150.7 112.454,150.7 111.236,149.482 110.79,149.482 SP2.3@110.345,149.037 ; SP2.3 110.254,149.154 112.9,151.8 117,151.8 118.2,150.6 v1@118.2,141.2 ; U7.4 113.046,74.106 114.306,74.106 v1(118.25,78.05) ; v1(132.5,103.9) v1@134.4,103.9 ; v1(133.9,129.4) 133.9,124.949 133.949,124.9 134,124.9 151.395,107.505 151.605,107.505 152.484,108.384 153.384,108.384 v1(153.5,108.5)
  other v1: 107.7,114.1 107.7,116.7
STRAIN_S+: R3.2 SP1.2 | length 14.1
  Top Layer w0.254: R3.2 100.4,146.3 104.5,142.2 v1(104.5,140.4)
  Bottom Layer w0.254: SP1.2 v1(104.5,140.4)
STRAIN_S-: R4.2 SP2.2 | length 44.1
  Top Layer w0.254: v1(94.6,147.3) 96.7,147.3 R4.2
  Bottom Layer w0.254: v1(94.6,147.3) 94.6,147.025 94.9,146.725 94.9,144.2 97.2,141.9 97.2,137.8 98.4,136.6 99.9,136.6 101.65,138.35 107.25,138.35 116.495,147.595 116.495,149.935 115.83,150.6 114.7,150.6 113.641,149.541 113.241,149.541 SP2.2@112.8,149.1
STRAIN_SCK: U1.25 U3.11 | length 75.6
  Top Layer w0.254: U3.11 114.693,157.607 v1(115.9,156.4) ; v1(136.4,109.6) 136.416,109.584 137.816,109.584 138.785,108.615 138.785,99.805 U1.25@138.87,99.72
  Bottom Layer w0.254: v1(115.9,156.4) 124.7,156.4 125.8,155.3 125.8,122.3 135.2,112.9 135.2,110.525 136.125,109.6 v1(136.4,109.6)
TMC_DIAG: U1.33 U2.12 | length 52.1
  Top Layer w0.254: U2.12 101.6,117.202 102.573,118.175 v1(102.675,118.175) ; U1.33 U1.33@118.696,99.976
  Bottom Layer w0.254: v1(102.675,118.175) 102.564,118.175 99.44,115.051 99.44,110.201 99.016,109.777 99.016,106.382 98.5,105.865 98.5,98.757 98.649,98.608 107.492,98.608 113,93.1 117.7,93.1 118.46,93.86 U1.33
TMC_UH: R13.2 U1.39 U2.3 | length 30.4
  Top Layer w0.254: R13.2 94.443,110.136 93.849,110.136 93.8,110.087 93.8,106.549 93.949,106.4 103.4,106.4 ; U2.3 101.2,112.9 101.4,112.7 103.251,112.7 103.4,112.551 103.4,106.4 ; U1.39 103.4,99.92 103.4,106.4
TMC_UL: R16.2 U1.36 U2.6 | length 22.6
  Top Layer w0.254: U2.6 105.927,114.4 106.2,114.127 R16.2 106.2,114.05 106.473,113.777 106.523,113.777 107.3,113 108,113 109.2,111.8 109.2,107.2 113,103.4 113,101.2 111.836,100.036 111.136,100.036 U1.36
TMC_VH: R14.2 U1.38 U2.4 | length 18.4
  Top Layer w0.254: U2.4 101.6,113.291 101.749,113.143 103.457,113.143 103.9,112.7 103.9,109.049 106.151,109.049 R14.2 106.2,100.75 106.056,100.606 106.056,100.036 U1.38
TMC_VL: R18.2 U1.34 U2.10 | length 30
  Top Layer w0.254: U2.10 102.876,116 104,117.124 104,118.5 104.6,119.1 105.927,119.1 R18.2@106.2,119.373 ; R18.2 R18.2@106.2,119.373 ; U1.34 115.66,99.74 114.1,101.3 114.1,103.7 110.4,107.4 110.4,112 109.2,113.2 109.2,115.2 108.8,115.6 108.8,117.451 108.651,117.6 108,117.6 106.523,119.077 106.473,119.077 106.2,119.35 R18.2@106.2,119.373
TMC_WH: R15.2 U1.37 U2.5 | length 19.4
  Top Layer w0.254: U2.5 102,113.6 103.8,113.6 104.5,112.9 104.5,111.749 104.649,111.6 R15.2 106.2,111.55 106.473,111.277 106.523,111.277 107.9,109.9 108.551,109.9 108.7,109.751 108.7,100.558 108.3,100.158 U1.37
TMC_WL: R17.2 U1.35 U2.7 | length 25.5
  Top Layer w0.254: U2.7 105.4,114.8 105.927,115.327 105.927,116.377 106.2,116.65 106.473,116.377 106.523,116.377 107.8,115.1 108.551,115.1 108.7,114.951 108.7,113 109.7,112 109.7,107.5 113.609,103.591 113.609,99.969 U1.35
U: LINK2.1 U2.15 | length 6.4
  Top Layer w0.254: v1(97.2,118.15) 97.337,118.15 97.987,117.5 99.395,117.5 100.067,116.828 100.4,116.828 U2.15
  Bottom Layer w0.254: LINK2.1@95.031,118.3 95.322,118.591 96.484,118.591 96.925,118.15 v1(97.2,118.15)
USB-RX: U1.11 U7.3 | length 21
  Top Layer w0.254: U7.3 112.995,76.205 112.995,75.362 114.05,74.306 114.05,73.75 114.7,73.1 116.1,73.1 126.08,83.08 U1.11
USB-TX: U1.10 U7.2 | length 20.6
  Top Layer w0.254: U7.2 113,78.74 113,77.907 114.05,76.857 114.05,75.35 115.673,73.727 115.883,73.727 123.54,81.384 U1.10
V: LINK2.2 U2.17 | length 4.9
  Top Layer w0.254: v1(96.825,115.825) 97.1,115.825 97.325,115.6 U2.17
  Bottom Layer w0.254: LINK2.2 95.165,115.958 96.692,115.958 v1(96.825,115.825)
W: LINK2.3 U2.1 | length 5.6
  Top Layer w0.254: v1(97.3,113.6) 100.4,113.6 U2.1
  Bottom Layer w0.254: LINK2.3 v1(97.3,113.6)
pads on no net: LED8.3 P1.1 P1.2 P1.3 P1.4 P2.1 P2.2 P2.3 P2.4 P3.1 P3.2 P3.3 P3.4 P4.1 P4.2 P4.3 P4.4 P5.1 P5.2 P5.3 P5.4 P6.1 P6.2 P6.3 P6.4 P7.1 P7.2 P7.3 P7.4 P8.1 P8.2 P8.3 P8.4 P9.1 P9.2 P9.3 P9.4 P10.1 P10.2 P10.3 P10.4 P11.1 P11.2 P11.3 P11.4 P12.1 P12.2 P12.3 P12.4 P13.1 P13.2 P13.3 P13.4 P14.1 P14.2 P14.3 P14.4 P15.1 P15.2 P15.3 P15.4 P16.1 P16.2 P16.3 P16.4 P17.1 P17.2 P17.3 P17.4 P18.1 P18.2 P18.3 P18.4 P19.1 P19.2 P19.3 P19.4 P20.1 P20.2 P20.3 P20.4 P21.1 P21.2 P21.3 P21.4 S1.1 S1.2 S1.3 S1.6 U1.1 U1.2 U1.12 U1.13 U1.14 U1.15 U1.27 U1.28 U1.29 U1.30 U1.31 U1.32 U2.19 U3.13 U4.3 U4.5 U10.1

## Polygon pours and split planes (outlines as drawn)
+3.3V on Top Layer "+3.3V_L01_P009" (solid, remove dead copper, pour order 9): 123.75,167.75 134.75,167.75 135,167.5 135,157.25 129.75,157.25 128,159 122.5,159 121.609,159.891 121.609,161.975 122.475,161.975 123.75,163.25
STRAIN_E- on Top Layer "STRAIN_E-_L01_P008" (solid, remove dead copper, pour order 8): 127.5,103.25 140.25,103.25 140.75,103.75 140.75,109.25 138,112 139.403,113.403 139.403,117.297 137.757,118.943 135.813,117 133.5,117 133.5,112.25 134.8,110.95 134.8,108 128,108 127.5,107.5
STRAIN_E- on Top Layer "STRAIN_E-_L01_P006" (solid, remove dead copper, pour order 6): 94.25,120 97.5,120 100.5,123 106,123 109.25,119.75 109.2,119.7 109.2,107.72 104.152,107.72 102.682,106.25 94.25,106.25 94.25,107.455 93.75,107.955 93.75,119.25
STRAIN_E- on Top Layer "STRAIN_E-_L01_P005" (solid, remove dead copper, pour order 5): 120.5,133.5 120.5,131 121.5,130 125.5,130 125.5,129.97 127.3,128.17 127.38,128.25 135,128.25 135,129 136.5,130.5 136.41,130.59 136.41,133.975 135.025,133.975 133.5,135.5 133.5,136.9 131.5,138.9 131.5,140.5 130.75,141.25 129.5,141.25 129.5,140.75 126.5,137.75 126.5,135.5 125.5,134.5 121.25,134.5
STRAIN_E- on Top Layer "STRAIN_E-_L01_P000" (solid, remove dead copper, pour order 0): 96,165 114.5,165 114.5,153.25 114,152.75 110.25,152.75 110.25,151.5 109.25,150.5 109.25,149.5 104,149.5 103,148.5 103,146.75 102.5,146.25 102.494,146.256 95.6,146.256 95.6,151.194 94.544,152.25 94.5,152.25 94.5,157.75 95.312,158.562 95.438,158.562 95.438,164.438

## Silkscreen, mask and mechanical layers (free items; w line width, h text height)
Top Overlay:
  circle w0.1: c129.215,132.81 r17.826
  circle w1: c129.182,132.81 r15
  lines w0.1: 126.932,111.908 129.182,111.908 131.432,111.908 ; 131.432,108.768 129.182,108.768 126.932,108.768 126.932,117.306 129.182,117.306 131.432,117.306
  lines w0.254: 134.225,135.925 134.925,135.225 138.975,135.225 139.675,135.925 139.675,141.175 138.975,141.875 134.925,141.875 134.225,141.175 134.225,135.925
  lines w1: 105.674,130.56 105.674,135.063 114.214,135.063 114.214,130.56 105.674,130.56 ; 126.932,108.768 131.435,108.768 131.435,117.309 126.932,117.309 126.932,108.768 ; 127.7,147.662 132.203,147.662 132.203,156.202 127.7,156.202 127.7,147.662 ; 144.182,130.56 144.182,135.063 152.722,135.063 152.722,130.56 144.182,130.56
  text "VenusXK" at 162.735,97 h1.7 r90
  text "powered by                   20230706" at 162.694,89.675 h1.5 r90
Mechanical 6:
  the board outline again, w0.254
Mechanical 15:
  lines w1: 110.2,147.45 110.2,145.22 124.07,131.35 152,131.35 152.325,131.025 ; 112.8,147.45 112.8,145.625 125.75,132.675 152.3,132.675 ; 115.349,147.345 115.349,145.651 127.025,133.975 152.225,133.975
  lines w2: 101.743,140.249 111.576,140.249 118.9,132.925 107.675,132.925

## Text inside footprints (layer, text, board x,y; h text height)
U2: Top Overlay "*" at 100.725,112.3 h1.27 r90; Mechanical 13 "*" at 100.835,113.841 h1.27 r90